# Altium PCB FABLAB_BADGE_00.PcbDoc
Units mm, origin at the board's own origin, x right, y up, seen from the top; angles counter-clockwise.
Board outline 42.06 x 34.99 mm, 2 copper layers (Top Layer, Bottom Layer), stack 1.571 mm thick; 3 components, 2 nets, 6 pads, 0 vias.
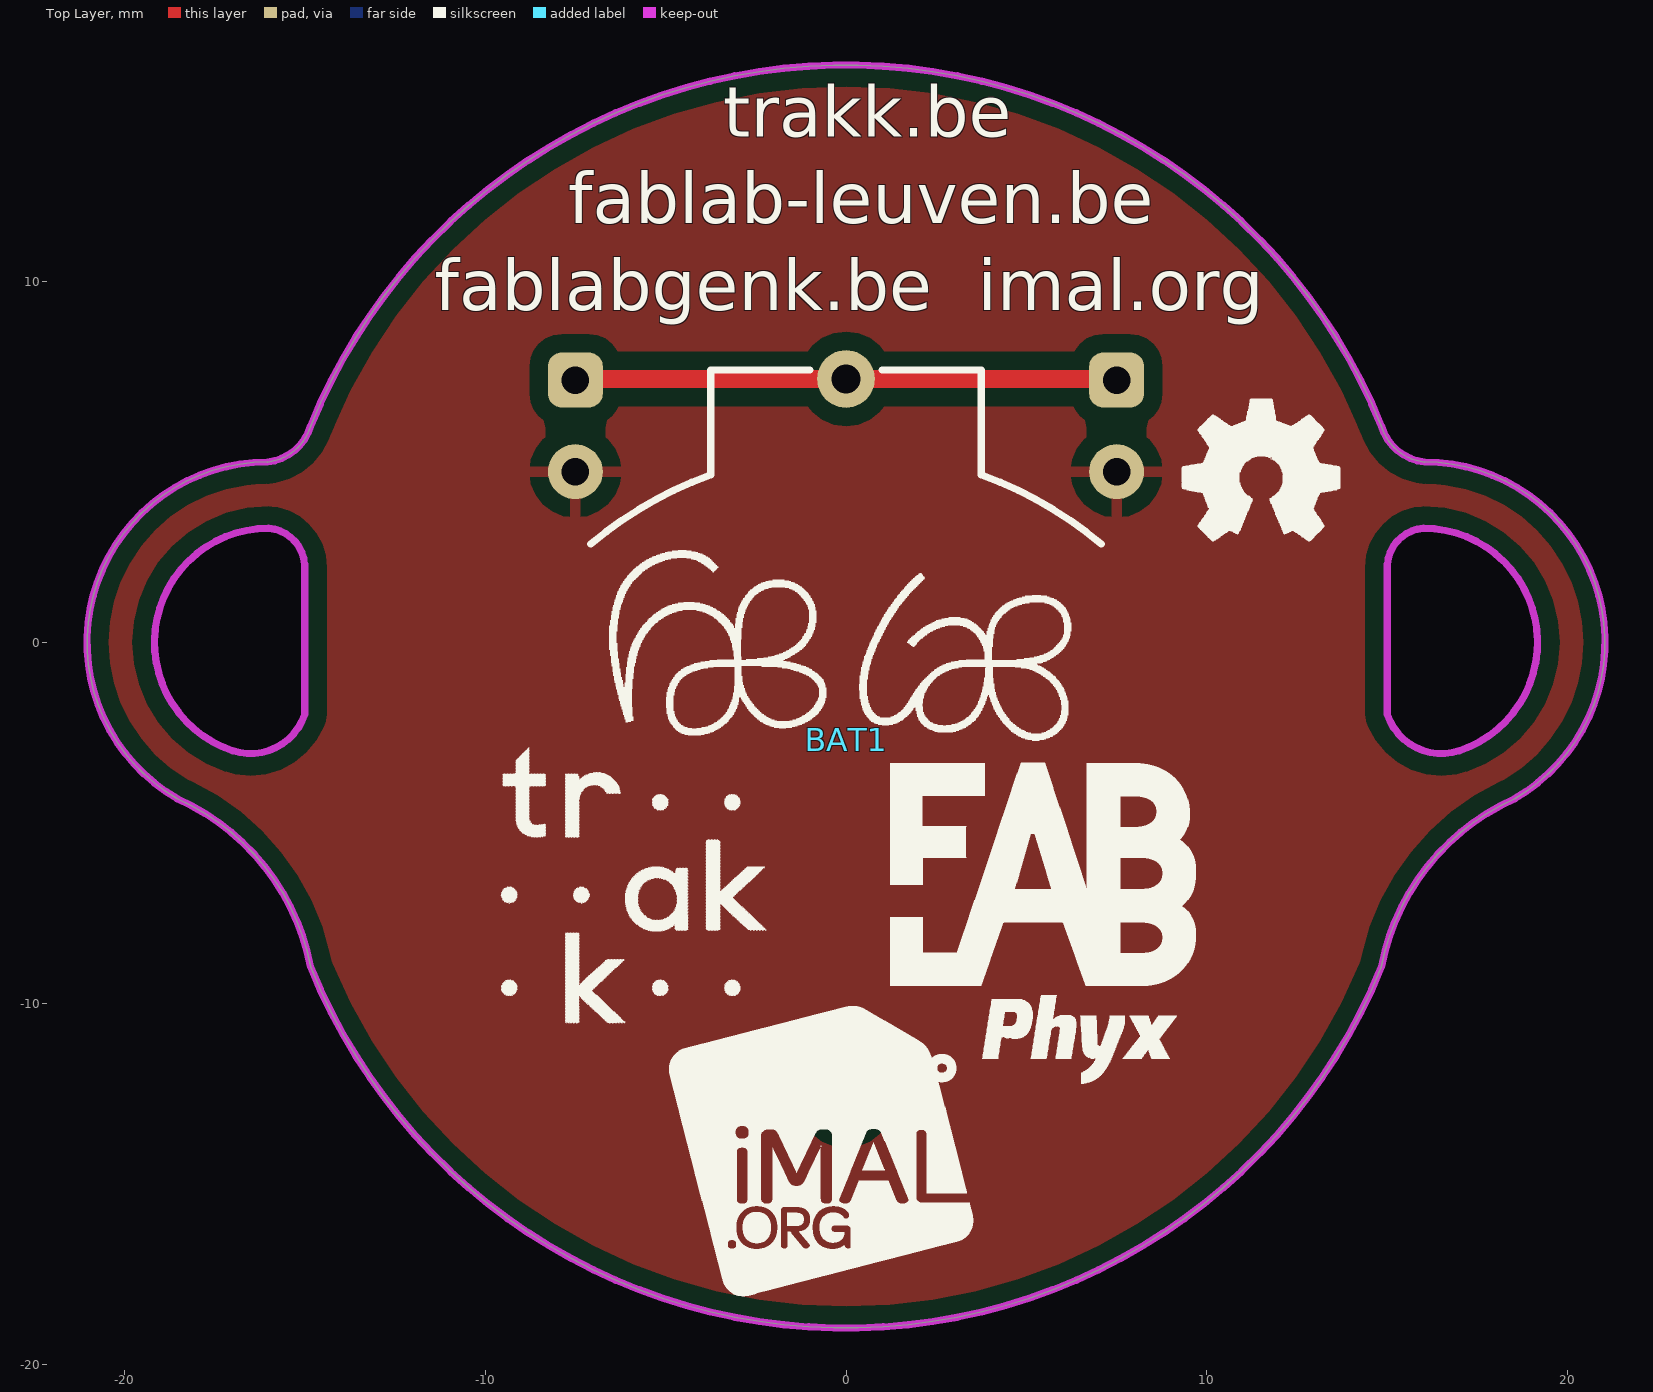
[diagram p0: Top Layer view]
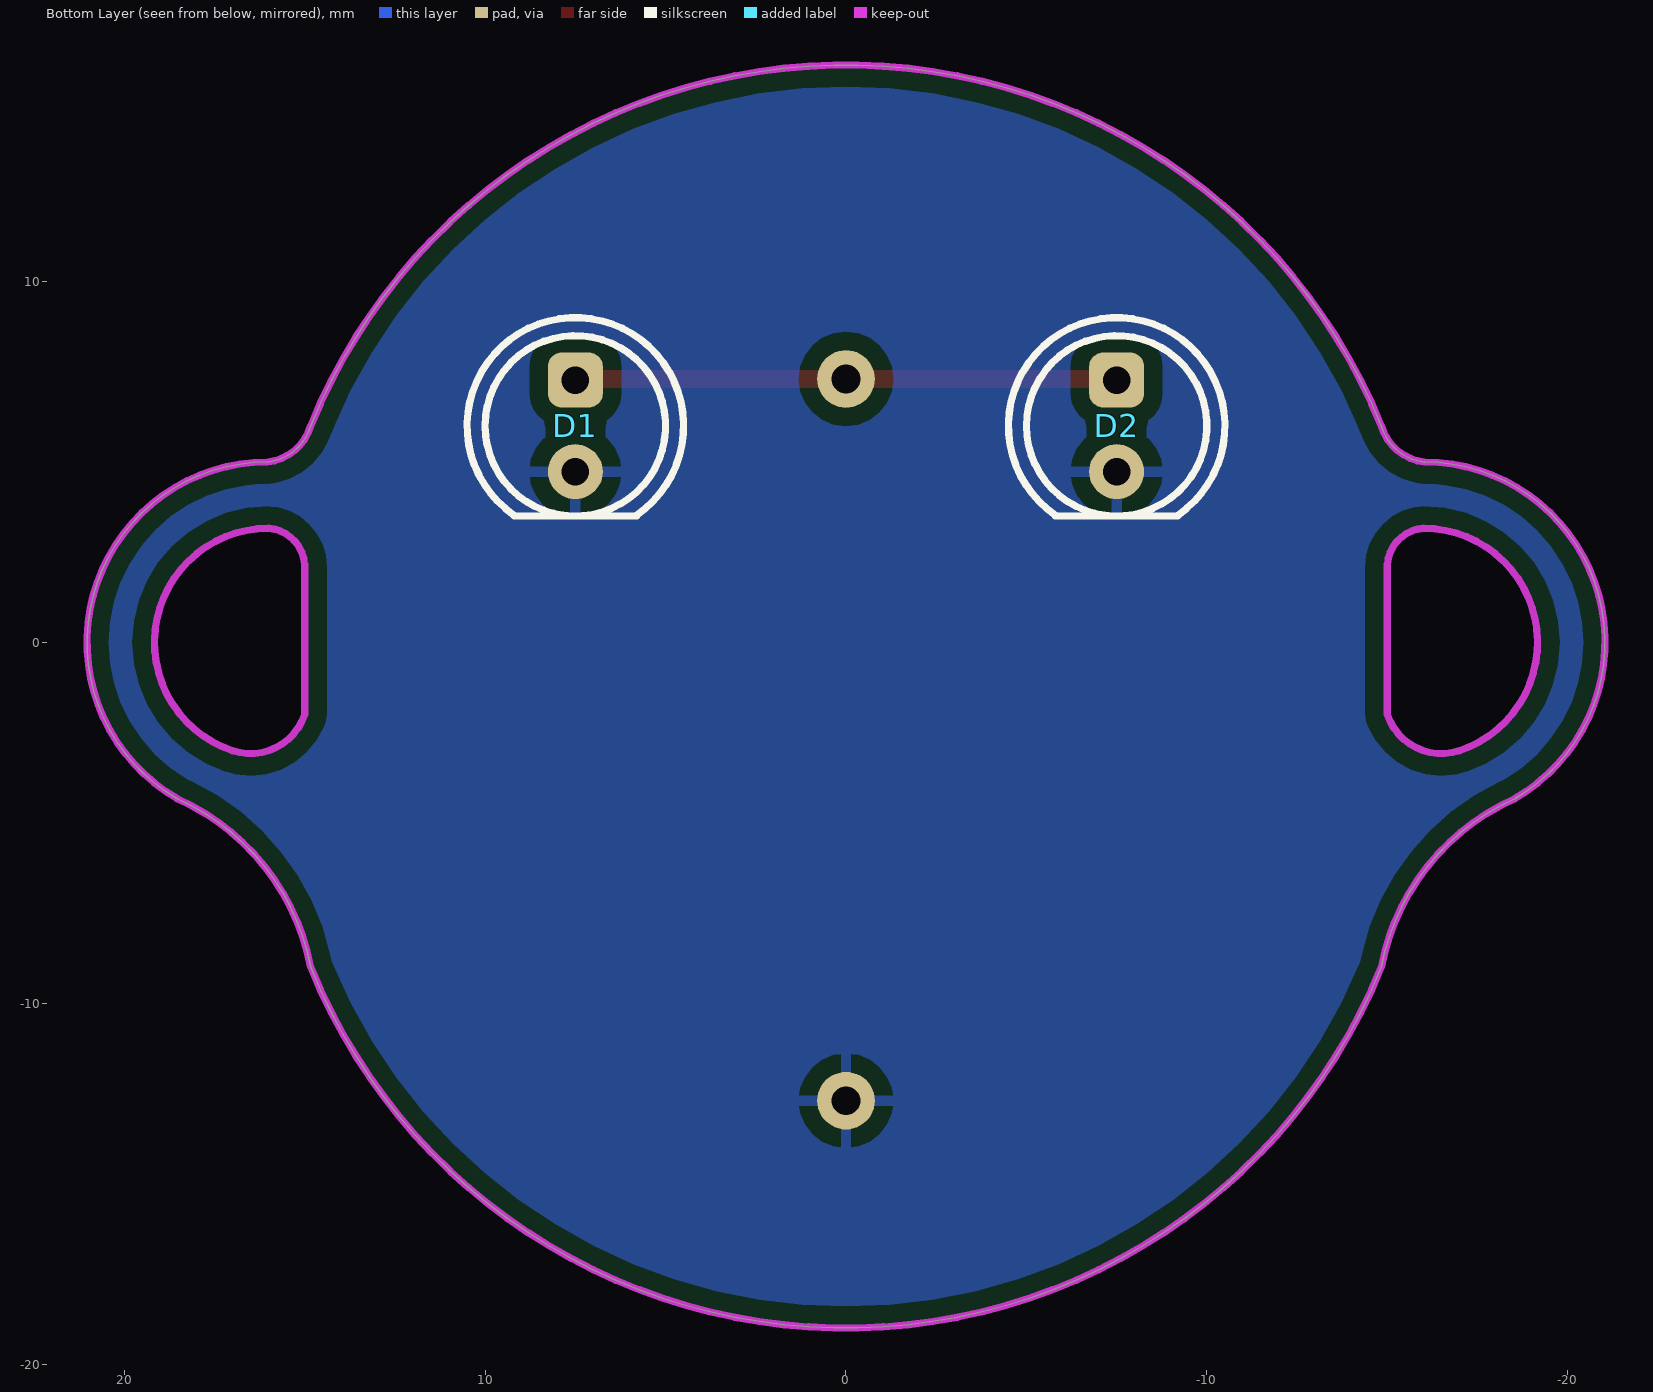
[diagram p1: Bottom Layer view, seen from below]

## Layer stack, top to bottom
Top Solder: solder mask 0.0102, Solder Resist, Dk 3.5
Top Layer: signal copper 0.0356
Dielectric1: dielectric 1.5, FR-4, Dk 4.8
Bottom Layer: signal copper 0.0356
Bottom Solder: solder mask 0.0102, Solder Resist, Dk 3.5

## Board outline
-14.835,-8.994 ccw(c-21.155,-10.206) -18.531,-4.33 cw(c-16.031,0) -16.031,5 -16.031,4.996 ccw(c-16.184,6.395) -14.835,5.994 cw(c0,0) 14.835,5.994 ccw(c16.184,6.395) 16.031,4.996 16.031,5 cw(c16.031,0) 18.531,-4.33 ccw(c21.155,-10.206) 14.835,-8.994 cw(c0,-3)
cut-out: -15,-2 -15,2 ccw(c-16.081,2.081) -16,3.162 ccw(c-16,0) -17,-3 ccw(c-16.5,-1.5)
cut-out: 15,-2 15,2 cw(c16.081,2.081) 16,3.162 cw(c16,0) 17,-3 cw(c16.5,-1.5)

## Design rules (kind name [scope] priority, off if disabled: settings)
Clearance [All] p1: gap=0.25 except(0.5: Arc-Poly Track-Poly SMDPad-Poly THPad-Poly Via-Poly Fill-Poly Poly-Poly)
PolygonConnect [All] p1: connectstyle=Relief reliefconductorwidth=0.3 reliefentries=4 polygonreliefangle="90 Angle" airgapwidth=0.5
RoutingVias [All] p1: holewidth=0.711 width=1.27 viastyle="Through Hole" minholewidth=0.711 minwidth=1.27 maxholewidth=0.711 maxwidth=1.27
SilkToSolderMaskClearance SilkscreenOverComponentPads [IsPad] p1: minsilkscreentomaskgap=0.254 clearancetoexposedcopper=TRUE
SolderMaskExpansion [All] p1: expansion=0.05
Width [All] p1: maxlimit=10 minlimit=0.25 preferedwidth=0.5
29 further rules are at their usual default settings.

## Components (designator, comment, footprint, x,y, rotation, side; value= is the part's Value field where it differs from the comment)
BAT1 "CR2032 Battery Holder" BAT_CR2032_China 0,0.3 r90 top
D1 "Default 5mm Green LED" LED_5MM_GR 7.5,6 r270 bottom
D2 "Default 5mm Green LED" LED_5MM_GR -7.5,6 r270 bottom

## Footprints (in the part's own frame and the unit in brackets; to place one, negate y for a bottom-side part, rotate by r counter-clockwise, add the part's x,y. Pads: shape width x height; smd on the part's side, far side on the other; paste and mask are expansions set on the pad)
BAT_CR2032_China [mm]
  round 1.6 hole 0.8: 1(7,0) 2(-13,0)
  silkscreen extent 2.43,-3.75 7.25,7.07, body extent -17.5,-11.5 7.25,11.5, height 9.2
LED_5MM_GR [mil] "5mm LED GREEN"
  rrect50% 60x60 hole 30: 1(-50,0)
  round 60 hole 30: 2(50,0)
  silkscreen extent -118,-118 98,118, body extent -117,-118 96,118, height 485

## Part data
BAT1: library part "BAT 20mm Coin Cell Holder Genericf", "=Description"
D1 D2: library part "LED Green 5mm", "=Description"

## Nets (pads, with @x,y where several pads share a name; then routed paths per layer and width w, separated by ;. In a path a pad name is that pad's centre, name@x,y a point inside that pad or via, vN(x,y) a via of type N, cw(c..) or ccw(c..) an arc to the next point about the centre after c; other vN are vias at no path point)
GND: BAT1.2 D1.2 D2.2
VBAT: BAT1.1 D1.1 D2.1 | length 15.1
  Top Layer w0.5: D2.1 -7.5,7.3 BAT1.1 7.5,7.3 D1.1

## Polygon pours and split planes (outlines as drawn)
GND on Bottom Layer "GND_L02_P002" (solid, remove dead copper, pour order 2): -23,19 -23,-22 1,-22 23,-22 23,19
GND on Top Layer "GND_L01_P004" (solid, remove dead copper, pour order 4): -23,17.972 -23,-23.028 1,-23.028 23,-23.028 23,17.972

## Keep-outs
Keep-Out Layer:
  lines w0.2: -16.031,5 ccw(c-16.031,0) -18.531,-4.33 cw(c-21.155,-10.206) -14.835,-8.994 ccw(c0,-3) 14.835,-8.994 cw(c21.155,-10.206) 18.531,-4.33 ccw(c16.031,0) 16.031,5 ; -16.031,4.996 ccw(c-16.184,6.395) -14.835,5.994 cw(c0,0) 14.835,5.994 ccw(c16.184,6.395) 16.031,4.996 ; -17,-3 cw(c-16,0) -16,3.162 cw(c-16.081,2.081) -15,2 -15,-2 cw(c-16.5,-1.5) -17,-3 ; 15,-2 ccw(c16.5,-1.5) 17,-3 ccw(c16,0) 16,3.162 ccw(c16.081,2.081) 15,2 15,-2
  text ".Layer_Name" at 285.5,-48 h3.5

## Other copper
Top Layer:
  text ".Layer_Name" at 285.5,-48 h3.5
Bottom Layer:
  text ".Layer_Name" at 285.5,-48 h3.5

## Silkscreen, mask and mechanical layers (free items; w line width, h text height)
Top Overlay:
  drawing of 27 lines, arcs and shapes, not listed
  text "trakk.be" at -3.4,13.55 h2.4
  text "fablab-leuven.be" at -7.7,11.15 h2.4
  text "fablabgenk.be" at -11.4,8.75 h2.4
  text "imal.org" at 3.65,8.75 h2.4
  text ".Layer_Name" at 285.5,-48 h3.5
Bottom Overlay:
  text ".Layer_Name" at 285.5,-48 h3.5
Top Paste:
  text ".Layer_Name" at 285.5,-48 h3.5
Bottom Paste:
  text ".Layer_Name" at 285.5,-48 h3.5
Top Solder:
  region: 1882 vertices and 0 holes, not listed, extent -1.525,-2.894 1.424,5.211
  text ".Layer_Name" at 285.5,-48 h3.5
Bottom Solder:
  text ".Layer_Name" at 285.5,-48 h3.5
Drill Guide:
  text ".Layer_Name" at 285.5,-48 h3.5
3D Symbols:
  text ".Layer_Name" at 285.5,-48 h3.5
Outline:
  lines w0.2: -16.031,5 ccw(c-16.031,0) -18.531,-4.33 cw(c-21.155,-10.206) -14.835,-8.994 ccw(c0,-3) 14.835,-8.994 cw(c21.155,-10.206) 18.531,-4.33 ccw(c16.031,0) 16.031,5 ; -16.031,4.996 ccw(c-16.184,6.395) -14.835,5.994 cw(c0,0) 14.835,5.994 ccw(c16.184,6.395) 16.031,4.996 ; -17,-3 ccw(c-16.5,-1.5) -15,-2 -15,2 ccw(c-16.081,2.081) -16,3.162 ccw(c-16,0) -17,-3 ; 15,-2 ccw(c16.5,-1.5) 17,-3 ccw(c16,0) 16,3.162 ccw(c16.081,2.081) 15,2 15,-2
Comments:
  text ".Layer_Name" at 285.5,-48 h3.5
Fabrication:
  text ".Layer_Name" at 285.5,-48 h3.5
Placebound Top:
  text ".Layer_Name" at 285.5,-48 h3.5
Placebound Bottom:
  text ".Layer_Name" at 285.5,-48 h3.5
Frame:
  drawing of 15 lines, arcs and shapes, not listed
  text "Document" at 281,-33 h2
  text ".PCB_TITLE" at 282.5,-38.5 h4
  text "Layer Name" at 281,-43 h2
  text "Date" at 281,-53 h2
  text "Rev" at 321,-53 h2
  text ".Print_Date" at 284,-58.5 h3.5
  text ".PCB_REV" at 325.5,-58.5 h4
  text "Desginer" at 231,-63 h2
  text "Document" at 281,-63 h2
  text ".Pcb_File_Name_No_Path" at 282.5,-68 h1.5
  text ".PCB_ENGINEER" at 235.5,-68.5 h4
Assembly Top:
  text ".Layer_Name" at 285.5,-48 h3.5
Assembly Bottom:
  text ".Layer_Name" at 285.5,-48 h3.5
Drill Drawing:
  text ".legend" at 172,-20 h4

## Dimensions
-21.031,0 to 21.031,0 on Fabrication
0,16 to 0,-19 on Fabrication